# Altium PCB 4layer_main_board.PcbDoc (part 1 of 2)
Units mm, origin at the board's own origin, x right, y up, seen from the top; angles counter-clockwise.
Board outline 50 x 100 mm, 4 copper layers (Top Layer, Int1 (GND), Int2 (PWR), Bottom Layer), stack 1.369 mm thick; 72 components, 43 nets, 314 pads, 85 vias.
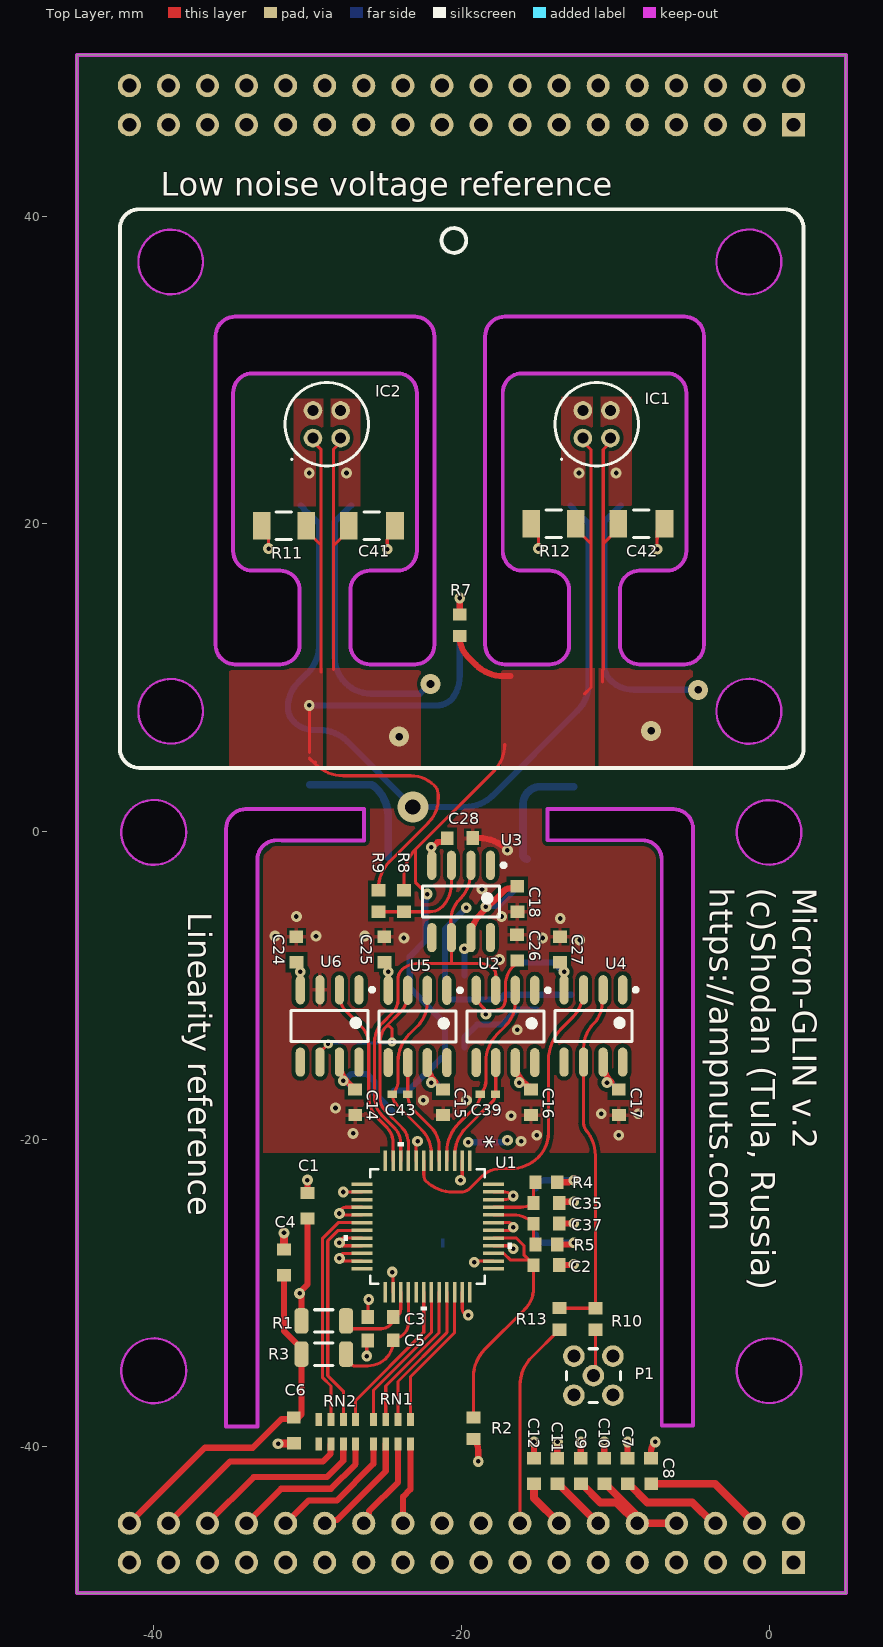
[diagram p0: Top Layer view]
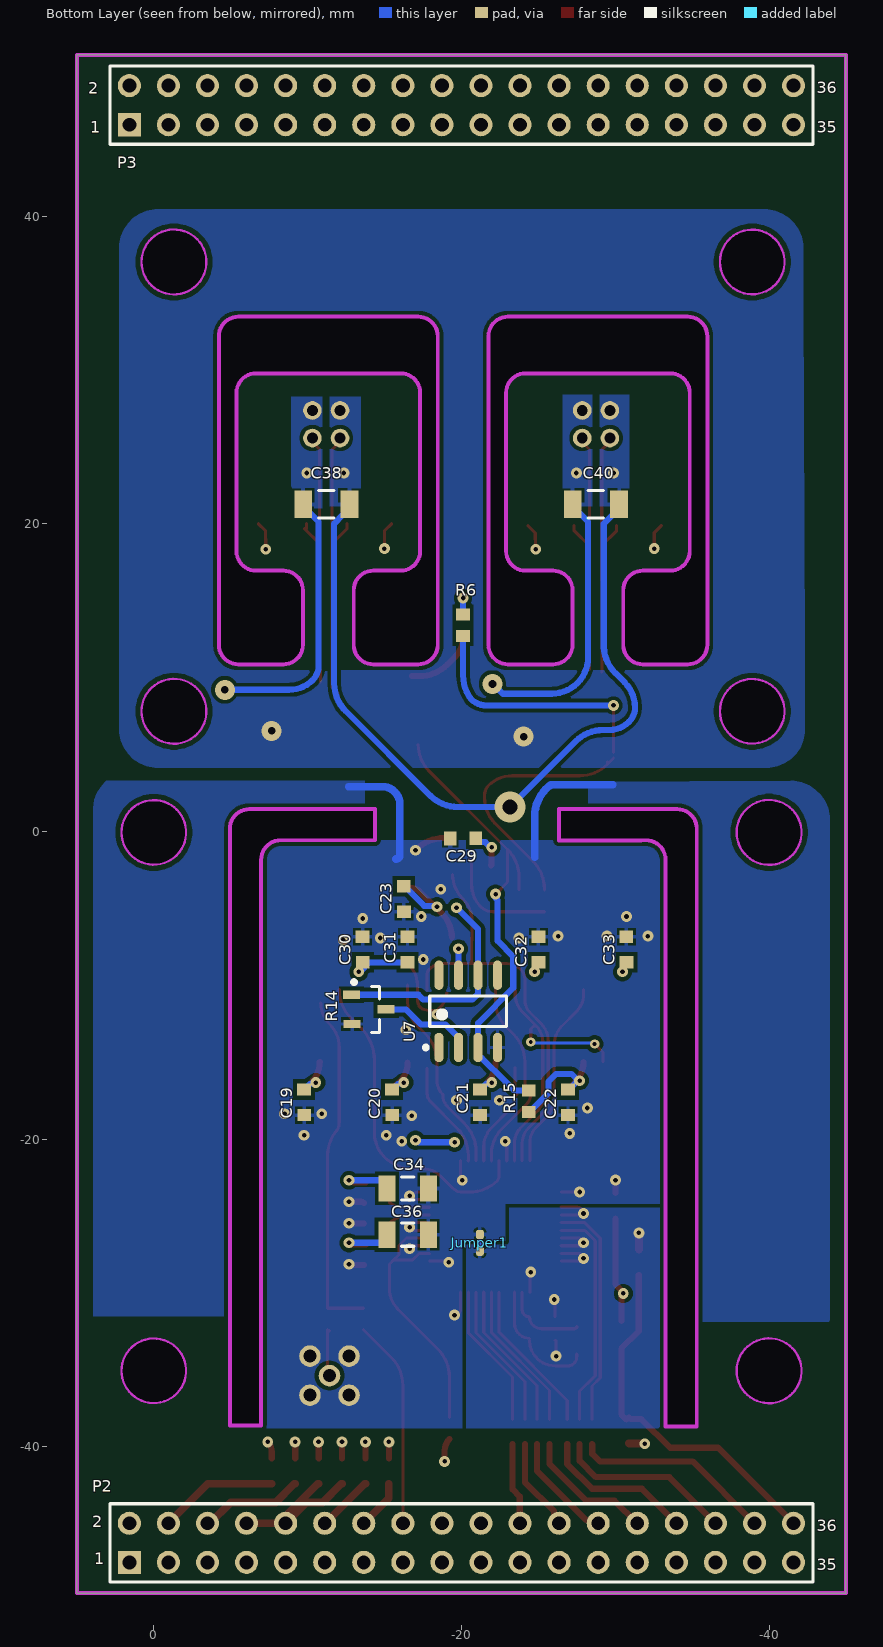
[diagram p1: Bottom Layer view, seen from below]
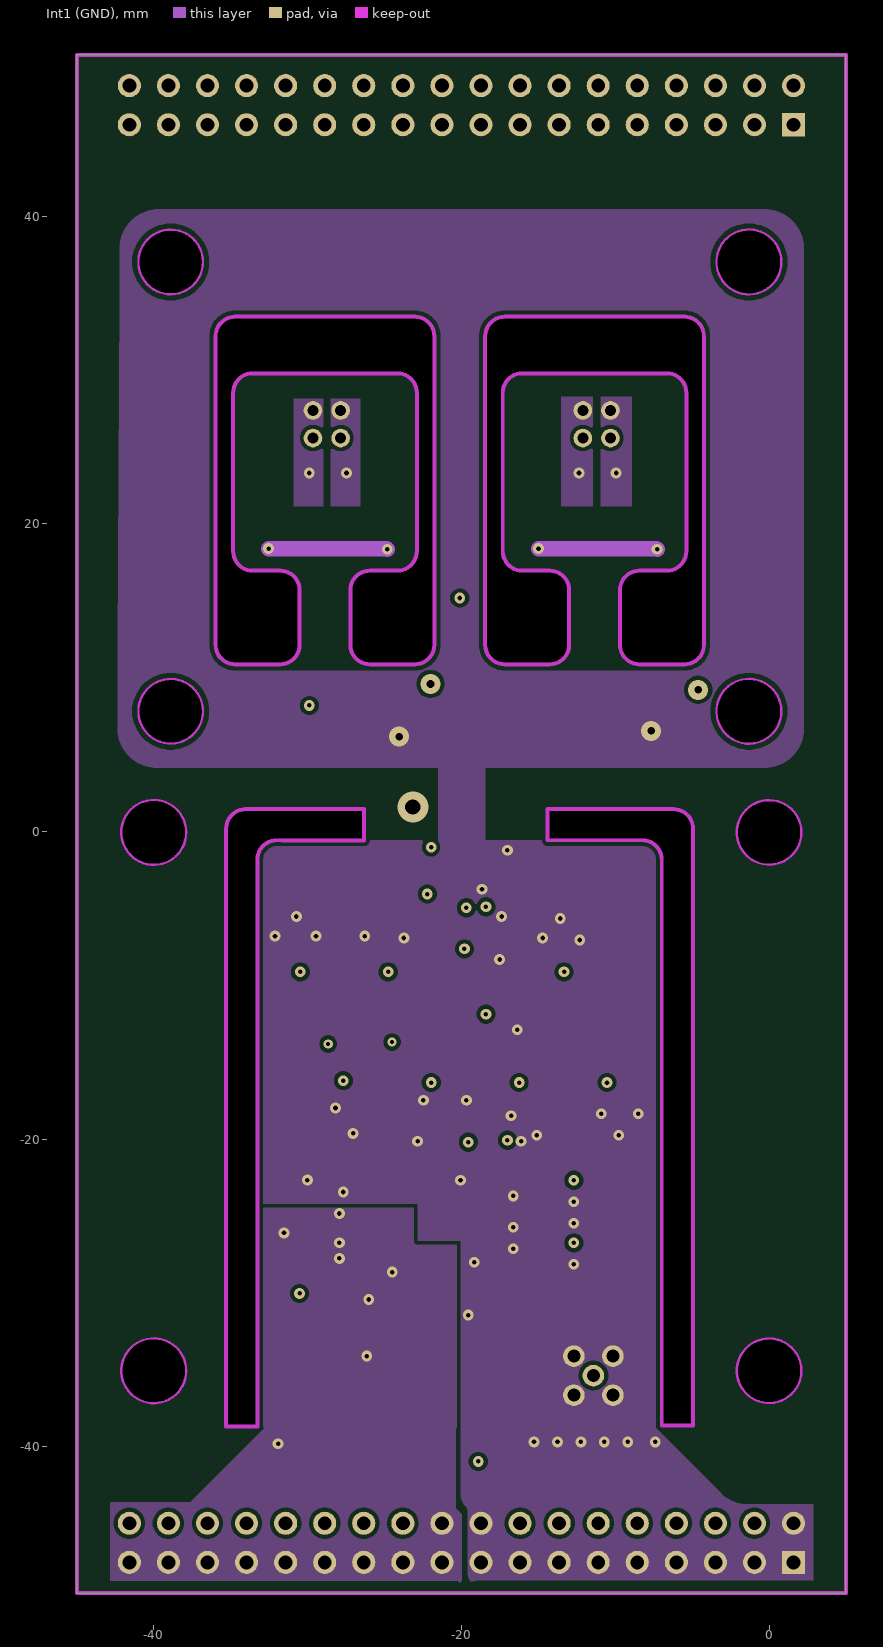
[diagram p2: Int1 (GND)]
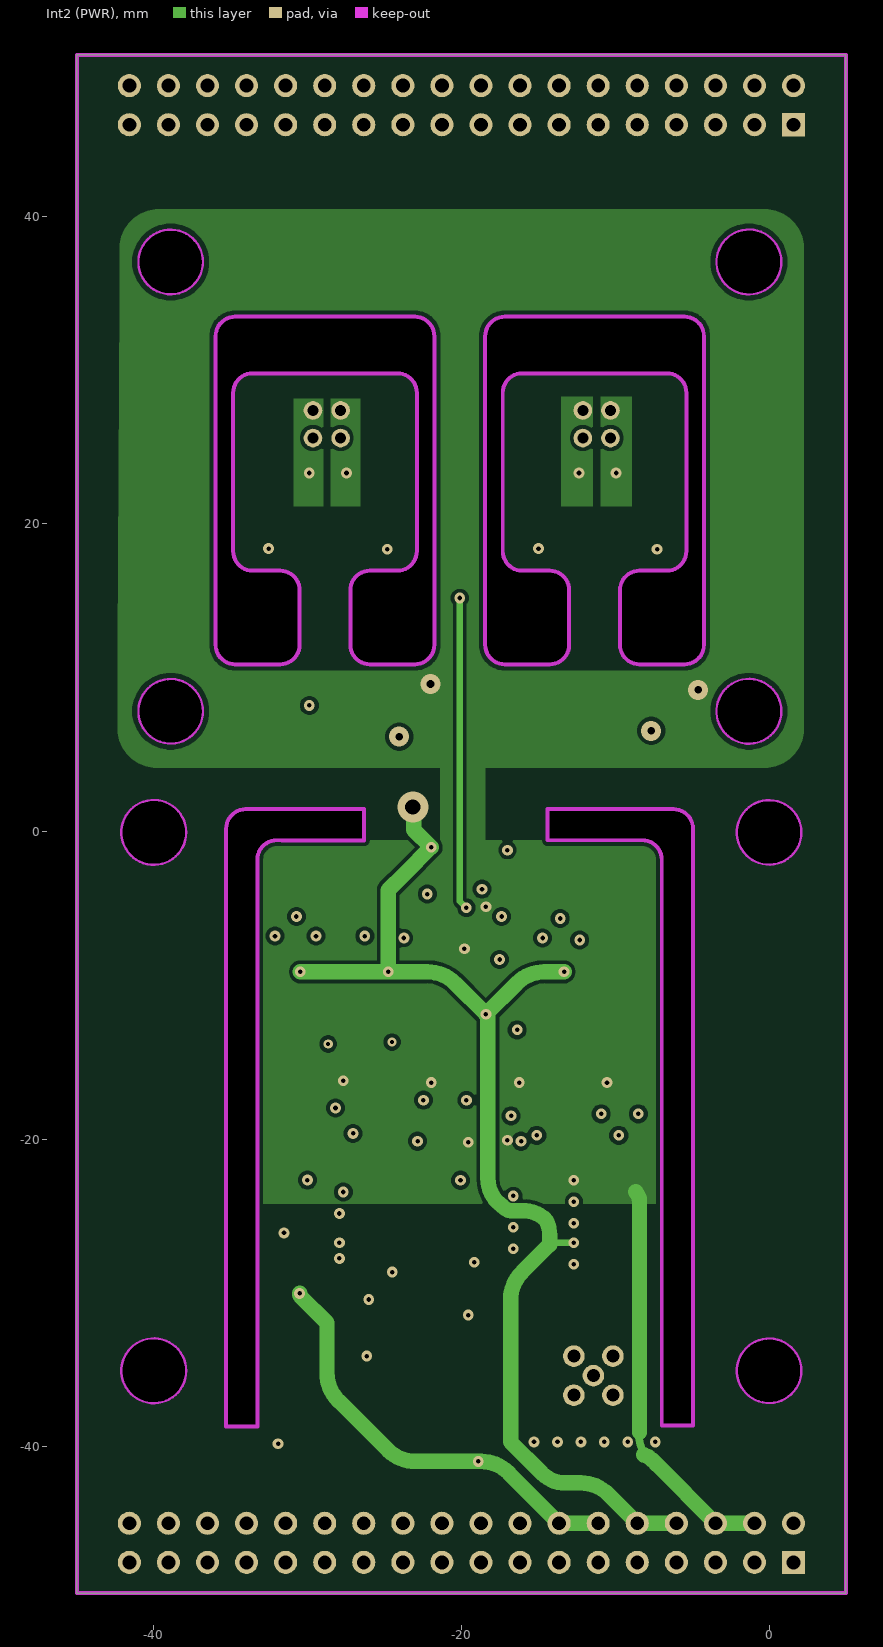
[diagram p3: Int2 (PWR)]

## Layer stack, top to bottom
Top Solder: solder mask 0.0254, SM-001, Dk 4
Top Layer: signal copper 0.035
Dielectric 1: prepreg 0.1295, PP-017, Dk 4.3
Dielectric 2: prepreg 0.1295, PP-017, Dk 4.3
Int1 (GND): signal copper 0.035
Dielectric 3: core 0.7112, Core-039, Dk 4.8
Int2 (PWR): signal copper 0.035
Dielectric 4: prepreg 0.1295, PP-017, Dk 4.3
Dielectric 5: prepreg 0.1295, PP-017, Dk 4.3
Bottom Layer: signal copper 0.035
Bottom Solder: solder mask 0.0254, SM-001, Dk 4

## Board outline
-45.005,-49.506 4.995,-49.506 4.995,50.494 -45.005,50.494
cut-out: -2.105,-35.052 ccw(c-0.005,-35.052) -0.005,-37.152 ccw(c-0.005,-35.052) 2.095,-35.052 ccw(c-0.005,-35.052) -0.005,-32.952 ccw(c-0.005,-35.052)
cut-out: -40.005,-2.162 cw(c-40.005,-0.052) -42.115,-0.052 cw(c-40.005,-0.052) -40.005,2.058 cw(c-40.005,-0.052) -37.895,-0.052 cw(c-40.005,-0.052)
cut-out: -2.105,-0.052 ccw(c-0.005,-0.052) -0.005,-2.152 ccw(c-0.005,-0.052) 2.095,-0.052 ccw(c-0.005,-0.052) -0.005,2.048 ccw(c-0.005,-0.052)
cut-out: -42.115,-35.052 ccw(c-40.005,-35.052) -40.005,-37.162 ccw(c-40.005,-35.052) -37.895,-35.052 ccw(c-40.005,-35.052) -40.005,-32.942 ccw(c-40.005,-35.052)
cut-out: -34.718,10.87 cw(c-34.718,12.14) -35.988,12.14 -35.988,32.206 cw(c-34.718,32.206) -34.718,33.476 -23.034,33.476 cw(c-23.034,32.206) -21.764,32.206 -21.764,12.14 cw(c-23.034,12.14) -23.034,10.87 -25.955,10.87 cw(c-25.955,12.14) -27.225,12.14 -27.225,15.696 cw(c-25.955,15.696) -25.955,16.966 -24.177,16.966 ccw(c-24.177,18.236) -22.907,18.236 -22.907,28.523 ccw(c-24.177,28.523) -24.177,29.793 -33.575,29.793 ccw(c-33.575,28.523) -34.845,28.523 -34.845,18.236 ccw(c-33.575,18.236) -33.575,16.966 -31.797,16.966 cw(c-31.797,15.696) -30.527,15.696 -30.527,12.14 cw(c-31.797,12.14) -31.797,10.87
cut-out: -17.192,10.87 cw(c-17.192,12.14) -18.462,12.14 -18.462,32.206 cw(c-17.192,32.206) -17.192,33.476 -5.508,33.476 cw(c-5.508,32.206) -4.238,32.206 -4.238,12.14 cw(c-5.508,12.14) -5.508,10.87 -8.429,10.87 cw(c-8.429,12.14) -9.699,12.14 -9.699,15.696 cw(c-8.429,15.696) -8.429,16.966 -6.651,16.966 ccw(c-6.651,18.236) -5.381,18.236 -5.381,28.523 ccw(c-6.651,28.523) -6.651,29.793 -16.049,29.793 ccw(c-16.049,28.523) -17.319,28.523 -17.319,18.236 ccw(c-16.049,18.236) -16.049,16.966 -14.271,16.966 cw(c-14.271,15.696) -13.001,15.696 -13.001,12.14 cw(c-14.271,12.14) -14.271,10.87
cut-out: -35.304,-38.67 -35.304,0.192 cw(c-34.034,0.192) -34.034,1.462 -26.336,1.462 -26.336,-0.56 cw(c-26.346,-0.56) -26.346,-0.57 -31.66,-0.57 cw(c-31.66,-0.56) -31.67,-0.56 -32.002,-0.56 ccw(c-32.002,-1.83) -33.272,-1.83 -33.272,-38.67
cut-out: -14.398,-0.56 -14.398,1.462 -6.221,1.462 cw(c-6.221,0.192) -4.951,0.192 -4.951,-38.611 -6.954,-38.611 cw(c-6.954,-38.582) -6.983,-38.582 -6.983,-1.83 ccw(c-8.253,-1.83) -8.253,-0.56
cut-out: -1.317,34.932 cw(c-1.317,37.032) -3.417,37.032 cw(c-1.317,37.032) -1.317,39.132 cw(c-1.317,37.032) 0.783,37.032 cw(c-1.317,37.032)
cut-out: -38.909,34.932 cw(c-38.909,37.032) -41.009,37.032 cw(c-38.909,37.032) -38.909,39.132 cw(c-38.909,37.032) -36.809,37.032 cw(c-38.909,37.032)
cut-out: -3.417,7.822 ccw(c-1.317,7.822) -1.317,5.722 ccw(c-1.317,7.822) 0.783,7.822 ccw(c-1.317,7.822) -1.317,9.922 ccw(c-1.317,7.822)
cut-out: -38.909,5.722 ccw(c-38.909,7.822) -36.809,7.822 ccw(c-38.909,7.822) -38.909,9.922 ccw(c-38.909,7.822) -41.009,7.822 ccw(c-38.909,7.822)

## Design rules (kind name [scope] priority, off if disabled: settings)
BoardOutlineClearance [All] p1: gap=0.381 ignorepadtopadclearanceinfootprint=FALSE
Clearance "Clearance Polygons" [InPolygon] p1: gap=0.254 ignorepadtopadclearanceinfootprint=FALSE except(0: Arc-Hole Track-Hole SMDPad-Hole THPad-Hole Via-Hole Fill-Hole Poly-Hole Region-Hole Text-Hole)
Clearance [All] p2: gap=0.127 ignorepadtopadclearanceinfootprint=FALSE except(0: Arc-Hole Track-Hole SMDPad-Hole THPad-Hole Via-Hole Fill-Hole Poly-Hole Region-Hole Text-Hole)
ComponentClearance "HM-TRP & UFL" [InComponent('X1') vs InComponent('U1')] p1: gap=0 collisioncheckmode=3 verticalgap=0 showdistances=FALSE
ComponentClearance [All] p2: gap=0.025 collisioncheckmode=3 verticalgap=0.025 showdistances=FALSE
DiffPairsRouting [All] p1: maxlimit=10 minlimit=0.127 mostfreqgap=0.203 toplayer_minwidth=0.127 toplayer_maxwidth=0.381 toplayer_prefwidth=0.203 midlayer1_minwidth=0.127 midlayer1_maxwidth=0.381 midlayer1_prefwidth=0.203 midlayer2_minwidth=0.127 midlayer2_maxwidth=0.381 midlayer2_prefwidth=0.203 bottomlayer_minwidth=0.127 bottomlayer_maxwidth=0.381 bottomlayer_prefwidth=0.203 maxuncoupledlength=12.7
HoleSize [All] p1: absolutevalues=TRUE maxlimit=6.731 minlimit=0.254 maxpercent=80.000 minpercent=20.000
HoleToHoleClearance [All] p1: gap=0.254 allowstackedmicrovias=FALSE
MinimumAnnularRing [All] p1: minimumring=0.102
MinimumSolderMaskSliver [All] p1: minsoldermaskwidth=0
PlaneClearance [All] p1: clearance=0.254
PlaneConnect [All] p1: planeconnectstyle=Relief reliefexpansion=0.102 reliefentries=4 reliefconductorwidth=0.152 reliefairgap=0.152
PolygonConnect PolygonConnect_pwr_gnd [IsPoly] p1: thpad.connectstyle=Direct thpad.reliefconductorwidth=0.254 thpad.reliefentries=4 thpad.polygonreliefangle="90 Angle" thpad.airgapwidth=0.152 smdpad.connectstyle=Relief smdpad.reliefconductorwidth=0.254 smdpad.reliefentries=4 smdpad.polygonreliefangle="90 Angle" smdpad.airgapwidth=0.152 via.connectstyle=Direct via.reliefconductorwidth=0.254 via.reliefentries=4 via.polygonreliefangle="90 Angle" via.airgapwidth=0.152
PolygonConnect PolygonConnect_1 [All] p2: connectstyle=Relief reliefconductorwidth=0.254 reliefentries=4 polygonreliefangle="90 Angle" airgapwidth=0.254
PolygonConnect "Via connect style" [isVia] p3: connectstyle=Direct reliefconductorwidth=0.254 reliefentries=4 polygonreliefangle="90 Angle" airgapwidth=0.254
RoutingCorners [All] p1: cornerstyle=45-Degree minsetback=1.25 maxsetback=1.25
RoutingVias [All] p1: holewidth=0.305 width=0.559 viastyle="Through Hole" minholewidth=0.254 minwidth=0.457 maxholewidth=2.54 maxwidth=2.896
SilkToSilkClearance [All] p1: silktosilkclearance=0
SilkToSolderMaskClearance [IsPad] p1: minsilkscreentomaskgap=0.127 clearancetoexposedcopper=TRUE
SolderMaskExpansion [All] p1: expansion=0.064 istentingtop=FALSE
Width GND [InNet('GND')] p1: maxlimit=0.762 minlimit=0.254 preferedwidth=0.508
Width Power [InNetClass('Power')] p2: maxlimit=1.016 minlimit=0.508 preferedwidth=0.762
Width 3V3 [InNetClass('3V3')] p3: maxlimit=0.762 minlimit=0.254 preferedwidth=0.508
Width [All] p4: maxlimit=10.16 minlimit=0.152 preferedwidth=0.203
20 further rules are at their usual default settings.

## Classes and differential pairs
component class shcematics: C1 C2 C3 C4 C5 C6 C7 C8 C9 C10 C11 C12 C14 C15 C16 C17 C18 C19 C20 C21 C22 C23 C24 C25 C26 C27 C28 C29 C30 C31 C32 C33 C34 C35 C36 C37 Jumper1 R1 R2 R3 R4 R5
component class v2: C38 C39 C40 C41 C42 C43 IC1 IC2 P1 P2 P3 R6 R7 R8 R9 R10 R11 R12 R13 R14 R15 RN1 RN2 U1 U2 U3 U4 U5 U6 U7

## Components (designator, comment, footprint, x,y, rotation, side; value= is the part's Value field where it differs from the comment)
C1 "10uF" "CAP 0603" -30.019,-24.309 r90 top
C2 "100nF" "CAP 0603" -14.476,-28.18 r0 top
C3 "100nF" "CAP 0603" -25.271,-31.558 r180 top
C4 "10uF" "CAP 0603" -31.543,-27.992 r90 top
C5 "100nF" "CAP 0603" -25.271,-33.082 r180 top
C6 "100nF" "CAP 0603" -30.908,-38.914 r90 top
C7 "100nF" "CAP 0603" -9.191,-41.581 r270 top
C8 "100nF" "CAP 0603" -7.667,-41.581 r270 top
C9 "100nF" "CAP 0603" -12.239,-41.581 r270 top
C10 "10uF" "CAP 0603" -10.715,-41.581 r270 top
C11 "100nF" "CAP 0603" -13.763,-41.581 r270 top
C12 "100nF" "CAP 0603" -15.287,-41.581 r270 top
C14 "100nF" "CAP 0603" -26.922,-17.588 r90 top
C15 "100nF" "CAP 0603" -21.207,-17.588 r90 top
C16 "100nF" "CAP 0603" -15.492,-17.588 r90 top
C17 "100nF" "CAP 0603" -9.777,-17.588 r90 top
C18 "100nF" "CAP 0603" -16.381,-4.38 r90 top
C19 "1uF" "CAP 0603" -9.777,-17.588 r90 bottom
C20 "1uF" "CAP 0603" -15.492,-17.588 r90 bottom
C21 "1uF" "CAP 0603" -21.207,-17.588 r90 bottom
C22 "1uF" "CAP 0603" -26.922,-17.588 r90 bottom
C23 "1uF" "CAP 0603" -16.254,-4.38 r90 bottom
C24 "100nF" "CAP 0603" -30.732,-7.682 r270 top
C25 "100nF" "CAP 0603" -25.017,-7.682 r270 top
C26 "100nF" "CAP 0603" -16.381,-7.555 r270 top
C27 "100nF" "CAP 0603" -13.587,-7.682 r270 top
C28 "100nF" "CAP 0603" -20.113,-0.433 r180 top
C29 "1uF" "CAP 0603" -20.113,-0.433 r180 bottom
C30 "1uF" "CAP 0603" -13.587,-7.682 r270 bottom
C31 "1uF" "CAP 0603" -16.508,-7.682 r270 bottom
C32 "1uF" "CAP 0603" -25.017,-7.682 r270 bottom
C33 "1uF" "CAP 0603" -30.732,-7.682 r270 bottom
C34 "10uF" C1206 -16.508,-23.193 r180 bottom
C35 "100nF" "CAP 0603" -14.476,-24.141 r0 top
C36 "10uF" C1206 -16.508,-26.207 r180 bottom
C37 "100nF" "CAP 0603" -14.476,-25.487 r0 top
C38 "1uF" CAPC3216X140N -11.223,21.284 r0 bottom
C39 "Cap Semi" 0402 -18.286,-17.08 r0 top value=100pF
C40 "1uF" CAPC3216X140N -28.749,21.284 r0 bottom
C41 "1uF" CAPC3216X140N -25.828,19.887 r0 top
C42 "1uF" CAPC3216X140N -8.302,20.014 r0 top
C43 "Cap Semi" 0402 -24.001,-17.08 r180 top value=100pF
IC1 "ADR1399KHZ" ADR1399KHZ -12.112,25.584 r45 top locked
IC2 "ADR1399KHZ" ADR1399KHZ -29.656,25.584 r45 top locked
Jumper1 "=value" "0402 jumper" -21.207,-26.732 r0 bottom net-tie
P1 "MMCX" MMCX2.54-V5 -11.428,-35.368 r0 top
P2 "Header 18X2" HDR2X18 1.585,-47.506 r180 bottom locked
P3 "Header 18X2" HDR2X18 1.585,45.954 r180 bottom locked
R1 "Ferrite beard" CC1206JRNPOBBN100 -28.954,-31.812 r180 top
R2 "10R" 1608[0603] -19.224,-38.787 r270 top
R3 "Ferrite beard" CC1206JRNPOBBN100 -28.954,-33.971 r180 top
R4 "10R" 1608[0603] -14.486,-22.795 r0 top
R5 "10R" 1608[0603] -14.486,-26.834 r0 top
R6 "2.67K 25ppmC" 1608[0603] -20.113,13.41 r270 bottom
R7 "2.67K 25ppmC" 1608[0603] -20.113,13.41 r270 top
R8 "2.67K 25ppmC" 1608[0603] -23.747,-4.507 r90 top
R9 "2.67K 25ppmC" 1608[0603] -25.398,-4.507 r90 top
R10 "50R" 1608[0603] -11.301,-31.685 r90 top
R11 "5R1" RESC3216X65N -31.543,19.887 r0 top
R12 "5R1" RESC3216X65N -14.017,20.014 r0 top
R13 "50R" 1608[0603] -13.636,-31.675 r90 top
R14 "MPMT50011002AT1" SOT23-3 -13.97,-11.557 r180 bottom value=5K
R15 "1M" 1608[0603] -24.384,-17.526 r90 bottom
RN1 "CAT16-470J4LF" CAT16-470J4LF -26.128,-38.213 r0 top
RN2 "CAT16-470J4LF" CAT16-470J4LF -29.684,-38.213 r0 top
U1 "DAC11001B" QFP_APFBR_TEX -22.203,-25.672 r270 top
U2 "OPA189ID" TI-D8_L -17.143,-12.668 r270 top
U3 "OPA189ID" TI-D8_L -20.025,-4.54 r270 top
U4 "OPA189ID" TI-D8_L -11.428,-12.635 r270 top
U5 "OPA189ID" TI-D8_L -22.858,-12.668 r270 top
U6 "OPA189ID" TI-D8_L -28.573,-12.635 r270 top
U7 "OPA189ID" TI-D8_L -20.447,-11.684 r90 bottom

## Footprints (in the part's own frame and the unit in brackets; to place one, negate y for a bottom-side part, rotate by r counter-clockwise, add the part's x,y. Pads: shape width x height; smd on the part's side, far side on the other; paste and mask are expansions set on the pad)
0402 [mm] "Chip Capacitor, Body 1.0x0.5mm, IPC High Density"
  rect 0.6x0.5 smd: 1(-0.5,0) 2(0.5,0)
  body extent -0.55,-0.3 0.55,0.3, height 1.3
"0402 jumper" [mm]
  rrect50% 0.5x0.6 smd: 1(0,0.545) 2(0,-0.545)
  Top Layer region: -0.125,0.275 0.075,0.275 0.075,-0.275 -0.1,-0.275
1608[0603] [mm]
  rect 0.8x0.9 smd: 1(-0.7,0) 2(0.7,0)
  body extent -0.87,-0.48 0.87,0.48, height 1.3
ADR1399KHZ [mm]
  round 1.214 hole 0.708: 1(0,0) 2(1.27,-1.27) 3(2.54,0) 4(1.27,1.27)
  silkscreen extent -2,-2.72 3.99,2.72, body extent -6.45,-7.54 8.81,7.72, height 6.1
C1206 [mm] "Chip Capacitor, Body 3.2x1.6mm, IPC High Density"
  rect 1.1x1.7 smd: 1(-1.35,0) 2(1.35,0)
  silkscreen extent -0.4,-0.75 0.4,0.75, body extent -1.7,-0.9 1.7,0.9, height 1.3
"CAP 0603" [mm] "Chip Capacitor, 2-Leads, Body 1,60x0,80mm, IPC Medium Density"
  rect 0.8x0.9 smd: 1(-0.84,-0.01) 2(0.82,0)
  body extent -0.85,-0.45 0.85,0.45, height 0.8
CAPC3216X140N [mm] "Chip Capacitor, Body 3.2x1.6mm, IPC Medium Density"
  rect 1.15x1.8 smd: 1(-1.5,0) 2(1.5,0)
  silkscreen extent -0.5,-0.9 0.5,0.9, body extent -1.7,-0.9 1.7,0.9, height 1.4
CAT16-470J4LF [mm]
  rect 0.45x0.85 smd: 1(0.4,0) 2(1.2,0) 3(2,0) 4(2.8,0) 5(0.4,-1.6) 6(1.2,-1.6) 7(2,-1.6) 8(2.8,-1.6)
  body extent 0,-1.6 3.2,0, height 0.5
CC1206JRNPOBBN100 [mm]
  rrect50% 0.9x1.65 smd: 1(-1.45,0) 2(1.45,0)
  silkscreen extent -0.6,-0.72 0.6,0.72, body extent -1.75,-0.8 1.75,0.8, height 0.7
HDR2X18 [mm] "Connector; Header; 18x2 Position"
  rect 1.5x1.5 hole 0.9: 1(0,0)
  round 1.5 hole 0.9: 2(0,2.54) 3(2.54,0) 4(2.54,2.54) 5(5.08,0) 6(5.08,2.54) 7(7.62,0) 8(7.62,2.54) 9(10.16,0) 10(10.16,2.54) 11(12.7,0) 12(12.7,2.54) 13(15.24,0) 14(15.24,2.54) 15(17.78,0) 16(17.78,2.54) 17(20.32,0) 18(20.32,2.54) 19(22.86,0) 20(22.86,2.54) 21(25.4,0) 22(25.4,2.54) 23(27.94,0) 24(27.94,2.54) 25(30.48,0) 26(30.48,2.54) 27(33.02,0) 28(33.02,2.54) 29(35.56,0) 30(35.56,2.54) 31(38.1,0) 32(38.1,2.54) 33(40.64,0) 34(40.64,2.54) 35(43.18,0) 36(43.18,2.54)
  silkscreen extent -1.27,-1.27 44.45,3.81
MMCX2.54-V5 [mm] "Connector; RF Coaxial, MMCX, Thru-Hole; 5 Position; Vertical"
  round 1.4 hole 0.85: 1(0,0) 2(-1.27,-1.27) 3(1.27,-1.27) 4(1.27,1.27) 5(-1.27,1.27)
  silkscreen extent -1.75,-1.75 1.75,1.75, body extent -1.78,-1.75 1.73,1.75, height 4.42
QFP_APFBR_TEX [mil]
  rect 53.5x9 smd paste+0 mask+0: 1(-168.25,108.3) 2(-168.25,88.6) 3(-168.25,68.91) 4(-168.25,49.22) 5(-168.25,29.53) 6(-168.25,9.85) 7(-168.25,-9.84) 8(-168.25,-29.53) 9(-168.25,-49.22) 10(-168.25,-68.91) 11(-168.25,-88.61) 12(-168.25,-108.3) 25(168.25,-108.3) 26(168.25,-88.6) 27(168.25,-68.91) 28(168.25,-49.22) 29(168.25,-29.53) 30(168.25,-9.84) 31(168.25,9.85) 32(168.25,29.53) 33(168.25,49.22) 34(168.25,68.91) 35(168.25,88.61) 36(168.25,108.3)
  rect 9x53.5 smd paste+0 mask+0: 13(-108.3,-168.25) 14(-88.6,-168.25) 15(-68.92,-168.25) 16(-49.23,-168.25) 17(-29.54,-168.25) 18(-9.84,-168.25) 19(9.85,-168.25) 20(29.53,-168.25) 21(49.22,-168.25) 22(68.91,-168.25) 23(88.61,-168.25) 24(108.29,-168.25) 37(108.29,168.25) 38(88.6,168.25) 39(68.91,168.25) 40(49.22,168.25) 41(29.53,168.25) 42(9.84,168.25) 43(-9.85,168.25) 44(-29.54,168.25) 45(-49.23,168.25) 46(-68.92,168.25) 47(-88.61,168.25) 48(-108.3,168.25)
  silkscreen extent -215,-215 215,215, body extent -181,-181 181,181, height 47
RESC3216X65N [mm] "Chip Resistor, EIA 1206, Metric 3216, Body 3.2x1.6mm, IPC Medium Density"
  rect 1.15x1.8 smd: 1(-1.45,0) 2(1.45,0)
  silkscreen extent -0.5,-0.9 0.5,0.9, body extent -1.67,-0.87 1.68,0.88, height 0.65
SOT23-3 [mm] "SOT23, 3-Leads, Body 2,90x2,45mm, Pitch 0,95mm, IPC Medium Density"
  rect 1.1x0.55 smd: 1(-1.12,0.95) 2(-1.07,-0.95) 3(1.14,0)
  silkscreen extent -1.08,-1.5 0.7,1.9, body extent -1.27,-1.5 1.33,1.5, height 1.1
TI-D8_L [mm] "SOIC, 8-Leads, Body 4.9x3.9mm, Pitch 1.27mm, IPC High Density"
  oval 1.9x0.6 smd: 1(-2.35,1.905) 2(-2.35,0.635) 3(-2.35,-0.635) 4(-2.35,-1.905) 5(2.35,-1.905) 6(2.35,-0.635) 7(2.35,0.635) 8(2.35,1.905)
  silkscreen extent -2.47,-2.5 1,2.88, body extent -2,-2.5 2,2.5, height 1.75

## Part data
C1 C2 C3 C4 C5 C6 C7 C8 C9 C10 C11 C12 C14 C15 C16 C17 C18 C19 C20 C21 C22 C23 C24 C25 C26 C27 C28 C29 C30 C31 C32 C33 C34 C35 C36 C37: library part "Cap Semi", "Capacitor (Semiconductor SIM Model)", LatestRevisionDate=29-May-2009, LatestRevisionNote="IPC-7351 Footprint Added.", Order=CC0603KRX7R8BB104, PackageDescription="Chip Capacitor", PackageReference=C1206, Published=8-Jun-2000, Publisher="Altium Limited"
C38 C40 C41 C42: library part CC1206_1UF_25V_10%_X7R, "Non-polarised capacitor", Case=1206, Manufacturer=GENERIC, Manufacturer1 ComponentHeight=1.75mm, Manufacturer1 Example=KEMET, Manufacturer1 Part Number=C1206C105K3RAC, Tolerance=±10%, Voltage=25V, Author="CERN DEM JLC", Component Type=Standard, CreateDate=03.12.2007, HelpURL=\\cern.ch\dfs\Applications\Altium\Datasheets\CC1206_X7R_KEMET.pdf, LatestRevisionDate=03.12.2007, Manufacturer Part Number=CC1206_1UF_25V_10%_X7R, Mounted=Yes, Part Description="SMD Multilayer Chip Ceramic Capacitor", Part Number=CC1206_1UF_25V_10%_X7R, Pin Count=2, Sense=No, SMD=Yes, Socket=No, Status=Preferred, TC=X7R
C39 C43: "Capacitor (Semiconductor SIM Model)", LatestRevisionDate=29-May-2009, LatestRevisionNote="IPC-7351 Footprint Added.", PackageDescription="Chip Capacitor", PackageReference=C1206, Published=8-Jun-2000, Publisher="Altium Limited"
IC1 IC2: "Integrated Circuit", Manufacturer_Name="Analog Devices", Datasheet Link=https://www.analog.com/media/en/technical-documentation/data-sheets/adr1399.pdf, Height=2.667mm, Manufacturer_Part_Number=ADR1399KHZ
Jumper1 R1 R2 R3 R4 R5 R6 R7 R8 R9 R10 R13 R15: library part "Resistor 0805", Avail=20
  R1 R2 R3 R4 R5: Order=ERA-3AEB4992V
  R6 R7 R15: BOM Order=ERA-3AEB2671V, Order=ERA-3AEB49R9V
  R8 R9 R10 R13: Order=ERA-3AEB49R9V
P1: library part COAX-M, "RF Coaxial PCB Connector, MMCX; Thru-Hole, Vertical Mount Plug,  50 Ohm Impedance", PackageDocument="Rev. A, 16-Jun-1997", ComponentLink1Description="Manufacturer Link", ComponentLink1URL=http://www.amphenolrf.com/, DatasheetDocument=30-May-2003, DrillSize="Corresponds to nominal value.", LatestRevisionDate=15-Jul-2004, LatestRevisionNote="Component Replaced.", PackageReference=908-21103, PCB_Layout="Complies with manufacturer's recommendation.", Published=15-Jul-2004, Publisher="Altium Limited"
P2 P3: "Header, 18-Pin, Dual row", LatestRevisionDate=17-Jul-2002, LatestRevisionNote="Re-released for DXP Platform.", Publisher="Altium Limited"
R11 R12: library part R1206_5R6_1%_0.25W_200PPM, "Resistor - 1%", Case=1206, Manufacturer=GENERIC, Manufacturer1 ComponentHeight=0.65mm, Manufacturer1 Example="YAGEO PHYCOMP", Manufacturer1 Part Number="232272465608L or RC1206FR-075R6L", Power=0.25W, Tolerance=±1%, Author="CERN DEM JLC", Component Type=Standard, CreateDate=24.06.2009, HelpURL=\\cern.ch\dfs\Applications\Altium\Datasheets\R1206_Phycomp_RC1206.pdf, LatestRevisionDate=17.10.2012, Manufacturer Part Number=R1206_5R6_1%_0.25W_200PPM, Mounted=Yes, Part Description="General Purpose Thick Film Chip Resistor", Part Number=R1206_5R6_1%_0.25W_200PPM, Pin Count=2, PressFit=No, Sense=No, SMD=Yes, Socket=No, Status=Preferred, TC=±200ppm/°C
R14: library part MPMT, Value2=10K, LatestRevisionDate=29-May-2009, LatestRevisionNote="IPC-7351 Footprint Added.", Order=MPMT50011002AT1, PackageDescription="Chip Resistor", PackageReference=J1-0603, Published=8-Jun-2000, Publisher="Altium Limited"
U1: library part DAC11001APFBR, "No Description Available", Built_By=EMA_Matt, Copyright="Copyright (C) 2018 Accelerated Designs. All rights reserved", Datasheet=https://www.ti.com/lit/ds/symlink/dac11001a.pdf, Manufacturer_Part_Number=DAC11001APFBR, RefDes=RefDes, SourceLibrary=Texas_Instruments_2020-07-20, Type=DEV, Vendor="Texas Instruments"
U2 U3 U4 U5 U6 U7: library part OPA140AIDR, "11 MHz, Single Supply, Low Noise, Precision, Rail-to-Rail Output, JFET Amplifier, 4.5 to 36 V, -40 to 125 degC, 8-pin SOIC (D8), Green (RoHS & no Sb/Br)", Manufacturer="Texas Instruments", Rating=Catalog, Supplier Part Number 1=OPA140AIDR-ND, Total Supply Voltage(Max)(+5V is 5, +/-5V is 10)=36, Total Supply Voltage(Min)(+5V is 5, +/-5V is 10)=4.5, CMRR(Min)(dB)=126, Code_JEDEC=MS-012, ComponentLink1Description="Manufacturer URL", ComponentLink1URL=http://www.ti.com/, ComponentLink2Description=Datasheet, ComponentLink2URL=http://www.ti.com/lit/ds/symlink/opa140.pdf, ComponentLink3Description="Package Specification", ComponentLink3URL=http://www.ti.com/litv/pdf/msoi002j, DatasheetVersion=SBOS498A, Eco-Plan="Green (RoHS & no Sb/Br)", GBW(Typ)(MHz)=11, IIB(Max)(pA)=10, Iq per channel(Max)(mA)=2, Mounting Technology="Surface Mount", Number of Channels=1, Offset Drift(Typ)(uV/C)=0.35, PackageDescription="8-Pin Plastic Small Outline, Body 4.9 x 3.9 mm, Pitch 1.27 mm", PackageReference=D8, PackageVersion="4040047-3/M, 06/2011", Packing="LARGE T&R", PartNumber=OPA189ID, Slew Rate(Typ)(V/us)=20, Sub Family="High Supply Voltage Amplifier (>=30V), Low Input Bias Current Amp (<=10pA), Low Noise Amp (<=10nV/rtHz), Low Offset Voltage Amplifier (<=500uV), Precision Amplifier", Supplier 1=Digi-Key, Supplier 2=Newark, Supplier 3=Mouser, Supplier Part Number 2=21T3836, Supplier Part Number 3=595-OPA140AIDR, Vio (25C)(Max)(mV)=0.12

## Via types
v1: diameter 0.7, hole 0.3, Top Layer to Bottom Layer, tented both sides, 78 vias
v2: diameter 1.3, hole 0.5, Top Layer to Bottom Layer, tented both sides, 4 vias
v3: diameter 0.6, hole 0.254, Top Layer to Bottom Layer, tented both sides, 2 vias
v4: diameter 2, hole 1, Top Layer to Bottom Layer, tented both sides, 1 vias

## Nets (pads, with @x,y where several pads share a name; then routed paths per layer and width w, separated by ;. In a path a pad name is that pad's centre, name@x,y a point inside that pad or via, vN(x,y) a via of type N, cw(c..) or ccw(c..) an arc to the next point about the centre after c; other vN are vias at no path point)
+3.3V: C4.1 C6.2 P2.36 R3.2 | length 23.5
  Top Layer w0.4: P2.36 -36.686,-40.057 -33.575,-40.057 -31.709,-38.191 -31.005,-38.191 C6.2 ; C4.1 -31.533,-32.467 -30.404,-33.596 R3.2 -30.404,-37.902 C6.2@-30.727,-38.225
+5V: C1.1 C11.2 C12.2 P2.12 P2.14 R1.2 R2.2 | length 43.6
  Top Layer w0.4: R1.2 -30.404,-30.228 -30.527,-30.105 v1(-30.527,-30.024) -30.527,-29.943 -30.009,-29.425 C1.1 ; R2.2 cw(c-19.977,-40.24) -18.912,-40.24 v1(-18.912,-40.946)
  Top Layer w0.5: C12.2 -15.287,-43.334 P2.14 P2.14@-13.655,-44.695 ; C11.2 -13.713,-42.401 -11.148,-44.966 P2.12
  Int2 (PWR) w1: v1(-30.527,-30.024) ccw(c-30.22,-30.024) -30.437,-30.241 -28.749,-31.929 -28.749,-35.195 ccw(c-26.209,-35.195) -28.005,-36.991 -24.794,-40.202 ccw(c-22.998,-38.406) -22.998,-40.946 v1(-18.912,-40.946) -18.727,-40.946 cw(c-18.727,-43.486) -16.931,-41.69 P2.14 P2.12
+15V: C7.2 C8.2 C14.2 C15.2 C16.2 C17.2 C18.2 C19.2 C20.2 C21.2 C22.2 C23.2 C34.1 C38.2 C40.2 IC1.3 IC2.3 P2.4 P2.6 R4.2 R15.1 U2.7 U3.7 U4.7 U5.7 U6.7 U7.7 | length 108.6
  Top Layer w0.4: U6.7 ccw(c-26.086,-14.985) -27.396,-16.294 C14.2 ; U5.7 ccw(c-20.451,-15.018) v1@-21.704,-16.271 ; U3.7 cw(c-17.22,-6.89) -18.754,-5.356 -17.27,-3.872 cw(c-16.823,-4.319) -16.823,-3.687 C18.2@-16.381,-3.687 ; U2.7 ccw(c-14.736,-15.018) C16.2@-15.439,-16.645 ; R4.2 -13.005,-22.795 ccw(c-13.005,-22.361) v1(-12.698,-22.668) ; U4.7 ccw(c-8.941,-14.985) v1@-10.251,-16.294
  Top Layer w0.5: C7.2 -9.141,-42.401 -7.929,-43.613 -5,-43.613 -3.647,-44.966 P2.6 ; C8.2 -3.52,-42.401 P2.4
  Int2 (PWR) w0.5: -8.429,-38.66 -8.585,-38.906 -8.377,-39.833 -8.142,-40.518
  Int2 (PWR) w1: -8.683,-23.42 cw(c-9.296,-24.033) -8.429,-24.033 -8.429,-38.66 -8.429,-39.063 cw(c-9.429,-39.061) -8.429,-39.065 ; -8.155,-40.523 ccw(c-7.667,-39.676) -8.001,-40.594 cw(c-8.34,-41.535) -7.634,-40.827 cw(c-8.34,-41.535) -7.632,-40.829 -7.337,-41.124 P2.6 P2.4
  Bottom Layer w0.4: C40.2@-27.174,21.208 -28.241,20.141 -28.241,11.334 ccw(c-25.872,11.334) -25.872,8.965 -22.702,8.965 -22.067,9.6 v2(-22.018,9.6) ; C22.2 -26.972,-16.768 -27.492,-16.248 -27.627,-16.248 v1(-27.684,-16.191) -27.603,-16.191 -27.16,-15.748 -26.162,-15.748 -25.654,-16.256 -25.654,-17.006 -24.434,-18.226 R15.1 ; v1(-21.969,-16.318) -21.912,-16.375 -21.65,-16.375 -21.257,-16.768 C21.2 ; U7.7 v1(-19.812,-7.62) ; v1(-19.558,-20.193) -17.226,-20.193 -17.099,-20.066 v1(-17.018,-20.066) ; v1(-18.413,-4.888) -18.356,-4.831 -17.575,-4.831 -16.304,-3.56 C23.2 ; v1(-16.254,-16.318) -16.197,-16.375 -15.935,-16.375 -15.542,-16.768 C20.2 ; C34.1 cw(c-14.633,-23.193) -14.633,-22.668 v1(-12.698,-22.668) ; v1(-10.539,-16.318) -10.482,-16.375 -10.22,-16.375 -9.827,-16.768 C19.2 ; C38.2@-9.648,21.208 -10.715,20.141 -10.715,10.774 ccw(c-9.414,10.774) -10.334,9.854 ccw(c-8.801,11.387) -8.801,9.219 v2(-4.619,9.219)
  other v1: -27.479,23.316 -9.953,23.316
-15V: C9.2 C10.2 C24.2 C25.2 C26.2 C27.2 C28.2 C29.2 C30.2 C31.2 C32.2 C33.2 C36.1 C38.1 C40.1 IC1.4 IC2.4 P2.8 P2.10 R5.2 U2.4 U3.4 U4.4 U5.4 U6.4 | length 156.7
  Top Layer w0.203: U2.4@-19.048,-10.509 ccw(c-17.9,-10.509) -18.712,-11.32 -18.517,-11.515 ; v1@-18.266,-11.619 -17.866,-11.619 ccw(c-17.866,-10.765) -17.262,-11.369 ccw(c-18.444,-10.826) -17.143,-10.826 -17.143,-9.953 cw(c-15.481,-9.953) -16.656,-8.777 C26.2@-16.381,-8.502
  Top Layer w0.4: U3.4 -21.95,-2.169 -21.95,-1.037 v1(-21.971,-1.016) -21.89,-1.016 -21.557,-0.683 -21.133,-0.683 -20.933,-0.483 C28.2 ; R5.2 -12.943,-26.834 ccw(c-12.943,-26.487) v1(-12.698,-26.732)
  Top Layer w0.5: C9.2 -12.189,-42.401 -10.977,-43.613 -9.928,-43.613 P2.10 ; C10.2 -10.665,-42.401 -8.1,-44.966 P2.8
  Int2 (PWR) w0.4: -14.271,-26.849 cw(c-13.989,-27.131) -13.989,-26.732 v1(-12.698,-26.732)
  Int2 (PWR) w1: v1(-30.478,-9.115) v1(-24.763,-9.115) ; v4(-23.161,1.599) -23.106,1.544 -23.106,0.119 v1(-21.971,-1.016) -23.704,-2.749 -24.763,-3.808 -24.763,-5.305 v1(-24.763,-9.115) ; v1(-13.333,-9.115) -14.603,-9.115 ccw(c-14.603,-11.655) -16.399,-9.859 v1(-18.413,-11.873) ; P2.8 P2.10 -10.454,-43.087 ccw(c-12.25,-44.883) -12.25,-42.343 -13.255,-42.343 cw(c-13.255,-40.197) -14.773,-41.714 -16.811,-39.676 -16.811,-30.441 cw(c-14.271,-30.441) -16.067,-28.645 -14.271,-26.849 -14.271,-26.214 ccw(c-16.329,-26.214) -14.511,-25.25 ccw(c-15.94,-26.679) -15.832,-24.661 ccw(c-15.94,-26.679) -15.94,-24.658 -16.53,-24.658 ccw(c-16.528,-25.658) -16.581,-24.659 cw(c-16.635,-23.684) -16.635,-24.661 cw(c-16.635,-23.684) -17.373,-24.324 ccw(c-18.127,-24.982) -17.631,-24.113 cw(c-16.05,-22.532) -18.286,-22.532 -18.286,-12 v1(-18.413,-11.873) ; v1(-24.763,-9.115) -22.223,-9.115 cw(c-22.223,-11.655) -20.427,-9.859 v1(-18.413,-11.873)
  Bottom Layer w0.4: C40.1@-30.451,21.209 -30.249,21.006 -30.249,20.959 -29.874,20.584 -29.827,20.584 -29.257,20.014 -29.257,12.108 cw(c-31.797,12.108) -29.26,11.987 cw(c-31.797,12.108) -30.001,10.312 -30.618,9.695 ccw(c-28.997,8.075) -31.289,8.075 ccw(c-29.998,8.075) -30.911,7.162 -30.861,7.112 ccw(c-29.635,8.338) -29.635,6.604 -29.21,6.604 cw(c-29.21,4.084) -27.428,5.866 v4(-23.161,1.599) -19.768,1.599 ccw(c-19.768,4.139) -17.972,2.343 -12.475,7.84 ccw(c-14.271,9.636) -11.731,9.636 -11.731,20.014 -12.301,20.584 -12.348,20.584 -12.723,20.959 -12.723,21.006 C38.1@-12.926,21.209 ; v1(-24.763,-9.115) v1@-24.736,-9.142 ; v1(-21.971,-1.016) -21.89,-1.016 -21.557,-0.683 -21.133,-0.683 -20.933,-0.483 C29.2 ; C31.2 -14.027,-8.502 -13.414,-9.115 v1(-13.333,-9.115) ; C36.1 ccw(c-14.633,-26.207) -14.633,-26.732 v1(-12.698,-26.732)
  other v1: -29.892,23.316 -12.366,23.316
AGND: C1.2 C2.2 C7.1 C8.1 C9.1 C10.1 C11.1 C12.1 C14.1 C15.1 C16.1 C17.1 C18.1 C19.1 C20.1 C21.1 C22.1 C23.1 C24.1 C25.1 C26.1 C27.1 C28.1 C29.1 C30.1 C31.1 C32.1 C33.1 C34.2 C35.2 C36.2 C37.2 C41.1 C42.1 IC1.2 IC2.2 Jumper1.2 P1.2 P1.3 P1.4 P1.5 P2.1 P2.2 P2.3 P2.5 P2.7 P2.9 P2.11 P2.13 P2.15 P2.17 P2.18 R14.2 U1.2 U1.8 U1.14 U1.35 U1.38 U1.40 U1.42 U1.43 U1.46 U1.47 U6.3 U7.4 | length 77.6
  Top Layer w0.203: -28.328,10.548 -28.328,18.562 ; IC2.2@-27.86,25.31 -28.328,24.843 -28.328,18.562 ; v1(-27.684,-23.43) -27.675,-23.421 U1.14 ; C41.1 -27.328,19.562 -28.328,18.562 ; U1.8 -22.954,-20.359 cw(c-22.627,-20.359) v1(-22.858,-20.128) ; v1(-20.064,-22.668) ccw(c-20.333,-22.399) -19.953,-22.399 U1.2 ; U1.35 -19.953,-31.034 ccw(c-19.556,-31.034) v1(-19.556,-31.431) ; v1(-19.175,-28.002) cw(c-19.095,-28.002) -19.095,-27.922 U1.38 ; U1.40 -16.826,-26.922 cw(c-16.826,-27.113) v1(-16.635,-27.113) ; U1.42 -16.841,-25.922 ccw(c-16.841,-25.716) v1(-16.635,-25.716) ccw(c-16.93,-25.716) -16.93,-25.421 U1.43 ; U1.46 -17.207,-23.921 ccw(c-17.207,-23.112) v1(-16.635,-23.684) ccw(c-17.27,-24.319) -17.27,-23.421 U1.47 ; -10.842,9.727 -10.842,10.489 -10.783,10.548 -10.783,18.708 ; IC1.2 -10.316,25.31 -10.783,24.843 -10.783,18.708 ; C42.1@-9.929,19.689 C42.1@-9.929,20.014 ; C42.1@-9.802,19.689 -10.783,18.708
  Top Layer w0.4: C1.2 v1@-30.019,-22.785 ; C28.1 -18.85,-0.423 cw(c-18.85,-2.963) -17.054,-1.167 v1(-17.016,-1.205) ; C12.1 -15.297,-39.7 cw(c-15.263,-39.7) v1(-15.287,-39.676) ; C11.1 -13.773,-39.7 cw(c-13.739,-39.7) v1(-13.763,-39.676) ; C2.2 -12.821,-28.18 ccw(c-12.821,-28.006) v1(-12.698,-28.129) ; C37.2 -12.759,-25.487 ccw(c-12.759,-25.401) v1(-12.698,-25.462) ; C35.2 cw(c-13.472,-24.325) -13.472,-24.065 v1(-12.698,-24.065) ; C9.1 -12.249,-39.7 cw(c-12.215,-39.7) v1(-12.239,-39.676) ; C10.1 -10.725,-39.7 cw(c-10.691,-39.7) v1(-10.715,-39.676) ; C7.1 -9.201,-39.7 cw(c-9.167,-39.7) v1(-9.191,-39.676) ; C8.1 -7.677,-40.313 cw(c-6.776,-40.313) v1(-7.413,-39.676)
  Bottom Layer w0.5: -29.845,3.048 -25.961,3.048 cw(c-25.961,2.614) -25.654,2.921 -25.509,2.776 cw(c-27.305,0.98) -24.765,0.98 -24.765,-1.651 ; -15.748,-1.778 cw(c-15.748,-1.524) -16.002,-1.524 -16.002,1.778 cw(c-14.859,1.778) -14.859,2.921 -12.7,2.921
  other v1: -30.019,-22.658 -16.127,-20.128 -15.111,-19.747 -9.777,-19.747 -27.049,-19.62 -16.779,-18.477 -10.92,-18.35 -8.507,-18.35 -28.192,-17.969 -22.477,-17.461 -19.683,-17.461 -16.381,-12.889 -17.524,-8.317 -12.317,-7.047 -23.747,-6.92 -14.73,-6.92 -32.129,-6.793 -29.462,-6.793 -26.287,-6.793 -13.587,-5.65 -30.732,-5.523 -17.397,-5.523 -18.667,-3.745
  other v2: -24.05,6.171 -7.667,6.552
DAC_ALARM: P2.32 RN2.7 | length 11.6
  Top Layer w0.4: P2.32 -33.511,-41.962 -28.749,-41.962 -27.684,-40.897 RN2.7
DAC_AVDD: C2.1 R2.1 U1.39 U1.41 | length 17.5
  Top Layer w0.203: R2.1 -19.224,-35.453 cw(c-16.684,-35.453) -18.48,-33.657 -15.91,-31.087 ccw(c-17.344,-29.653) -15.316,-29.653 C2.1 -15.316,-28.14 C2.1@-15.615,-27.841 ; U1.39 -17.917,-27.435 -17.241,-27.435 -16.835,-27.841 C2.1@-15.615,-27.841 ; U1.41 -16.437,-26.422 -15.948,-26.911 -15.948,-27.507 C2.1@-15.615,-27.841
DAC_CLR: P2.30 RN2.8 | length 10
  Top Layer w0.4: P2.30 -31.733,-42.724 -28.495,-42.724 -26.884,-41.113 RN2.8
DAC_DVDD: C3.1 R1.1 U1.27 | length 5.5
  Top Layer w0.203: R1.1@-27.504,-32.193 ccw(c-27.377,-32.193) -27.377,-32.32 -25.203,-32.32 ccw(c-25.203,-31.548) C3.1 ccw(c-24.431,-31.071) -23.954,-31.071 U1.27
DAC_IOVDD: C5.1 R3.1 U1.28 | length 8.1
  Top Layer w0.203: R3.1 -27.504,-34.151 ccw(c-26.922,-34.151) -27.44,-34.416 ccw(c-26.922,-34.151) -27.187,-34.669 ccw(c-26.922,-34.151) -26.922,-34.733 -26.092,-34.733 ccw(c-26.092,-33.072) -24.468,-33.421 C5.1 ; C5.1@-24.431,-32.945 ccw(c-24.431,-31.968) -23.454,-31.968 U1.28
DAC_LDAC: P2.34 RN2.6 | length 13.1
  Top Layer w0.4: P2.34 -35.035,-40.946 -29.003,-40.946 -28.509,-40.452 -28.509,-39.838 RN2.6
DAC_VCC: C35.1 R4.1 U1.45 | length 4.1
  Top Layer w0.203: U1.45 -16.152,-24.421 ccw(c-16.152,-23.239) C35.1@-15.316,-24.075 ; C35.1 C35.1@-15.316,-24.075 ; R4.1 ccw(c-14.872,-23.109) -15.316,-23.109 C35.1@-15.316,-24.075
DAC_VSS: C37.1 R5.1 U1.44 | length 4.1
  Top Layer w0.203: U1.44 -16.645,-24.921 cw(c-16.645,-26.801) C37.1@-15.316,-25.472 ; C37.1 -15.316,-26.52 ccw(c-14.872,-26.52) R5.1
DGND: C3.2 C4.2 C5.2 C6.1 Jumper1.1 P2.19 P2.20 P2.21 P2.23 P2.25 P2.27 P2.29 P2.31 P2.33 P2.35 U1.16 U1.17 U1.20 U1.21 U1.22 U1.23 U1.26 | length 15.3
  Top Layer w0.203: U1.23 -27.764,-27.922 cw(c-27.764,-27.748) v1(-27.938,-27.748) cw(c-27.612,-27.748) -27.612,-27.422 U1.22 ; U1.21 -27.748,-26.922 cw(c-27.748,-26.732) v1(-27.938,-26.732) cw(c-27.628,-26.732) -27.628,-26.422 U1.20 ; U1.17 -27.844,-24.921 cw(c-27.844,-24.827) v1(-27.938,-24.827) cw(c-27.532,-24.827) -27.532,-24.421 U1.16 ; v1(-26.16,-34.098) -26.16,-33.151 cw(c-26.091,-33.151) C5.2 ; C3.2 -26.091,-30.473 cw(c-26.033,-30.473) v1(-26.033,-30.415) ; v1(-24.509,-28.637) cw(c-24.509,-28.692) -24.454,-28.692 U1.26
  Top Layer w0.5: v1(-31.924,-39.803) -31.899,-39.778 -30.922,-39.778 C6.1 ; C4.2 v1(-31.543,-26.087)
NetC39_1: C39.1 U1.4 U2.2 | length 12.9
  Top Layer w0.203: U1.4 -20.953,-20.799 cw(c-18.413,-20.799) -20.209,-19.003 -19.14,-17.934 ccw(c-19.993,-17.08) C39.1 ccw(c-19.686,-16.179) -18.413,-16.179 -18.413,-14.957 cw(c-15.873,-14.957) -17.669,-13.161 -17.143,-12.635 ccw(c-18.676,-11.102) -16.508,-11.102 U2.2@-16.508,-9.968
NetC39_2: C39.2 U1.3 U2.6 | length 7
  Top Layer w0.203: U1.3 U1.3@-20.453,-21.389 ; U1.3@-20.444,-21.397 U1.3@-20.453,-21.389 ; U2.6@-17.778,-15.368 -17.778,-17.072 C39.2 cw(c-18.419,-17.08) -17.942,-17.496 cw(c-18.419,-17.08) -17.971,-17.527 -19.709,-19.265 ccw(c-17.913,-21.061) -20.453,-21.061 U1.3@-20.453,-21.389
NetC41_2: C41.2 R11.1 | length 11.1
  Top Layer w0.2: R11.1 -32.54,19.434 v1(-32.54,18.4)
  Top Layer w0.203: v1(-24.83,18.363) -24.83,18.97 -24.801,18.998 -24.801,19.414 C41.2
  Int1 (GND) w1: v1(-32.54,18.4) -24.867,18.4 v1(-24.83,18.363)
NetC42_2: C42.2 R12.1 | length 11.4
  Top Layer w0.203: R12.1 -14.996,19.543 v1(-14.996,18.4) v1@-15.033,18.363 ; v1(-7.286,18.363) -7.286,19.018 -7.275,19.028 -7.275,19.541 C42.2
  Int1 (GND) w1: v1(-14.996,18.4) -7.323,18.4 v1(-7.286,18.363)
NetC43_1: C43.1 U1.5 U5.6 | length 6.8
  Top Layer w0.203: C43.1@-23.628,-17.08 ccw(c-23.954,-16.754) -23.493,-16.754 U5.6@-23.493,-15.335 ; C43.1 ccw(c-21.987,-17.08) -23.058,-18.15 -21.969,-19.239 cw(c-23.214,-20.484) -21.453,-20.484 U1.5
NetC43_2: C43.2 U1.6 U5.2 | length 13.1
  Top Layer w0.203: U5.2@-22.223,-9.935 -22.223,-11.102 cw(c-24.391,-11.102) -22.858,-12.635 -23.384,-13.161 ccw(c-21.588,-14.957) -24.128,-14.957 -24.128,-16.179 cw(c-25.402,-16.179) C43.2 ccw(c-23.562,-17.08) -24.226,-17.744 -22.604,-19.366 cw(c-24.175,-20.937) -21.953,-20.937 U1.6
NetIC2_1: IC2.1 R6.2 R9.2 R11.2 | length 56.7
  Top Layer w0.152: -29.13,10.362 -29.13,16.3
  Top Layer w0.2: -29.13,10.362 -29.13,16.3
  Top Layer w0.203: R11.2 -30.093,19.562 -29.13,18.599 ; -29.892,4.774 -29.493,4.375 ccw(c-27.697,6.171) -27.697,3.631 -23.297,3.631 cw(c-23.297,1.463) -21.764,2.996 cw(c-22.377,2.383) -21.51,2.383 -21.51,2.171 cw(c-23.81,2.171) -21.574,1.631 cw(c-23.81,2.171) -21.833,0.995 cw(c-23.81,2.171) -22.184,0.544 -24.654,-1.926 ccw(c-22.858,-3.722) -25.398,-3.722 R9.2 ; -29.892,5.155 v1(-29.892,8.203) ; IC2.1 -29.656,25.347 -29.13,24.821 -29.13,18.599 ; -29.511,4.52 -29.493,4.502 ; -29.13,16.3 -29.13,18.599
  Bottom Layer w0.4: v1(-29.892,8.203) -21.623,8.203 ccw(c-21.623,9.617) -20.623,8.617 ccw(c-22.653,10.144) -20.113,10.144 R6.2
NetP1_1: P1.1 R10.1 | length 3.2
  Top Layer w0.203: P1.1 ccw(c-11.735,-35.061) -11.301,-35.061 R10.1@-11.301,-32.574 ; R10.1@-11.428,-32.447 R10.1@-11.301,-32.574 ; R10.1 R10.1@-11.301,-32.574
NetR8_1: R8.1 R9.1 U3.3 | length 7.8
  Top Layer w0.203: R9.1 R8.1 -22.05,-5.207 ccw(c-22.05,-4.084) -21.256,-4.878 ccw(c-22.696,-3.438) -20.66,-3.438 U3.3 U3.3@-20.66,-1.459
NetR10_2: R10.2 R13.2 U4.2 U4.6 | length 22.9
  Top Layer w0.203: R13.2 ccw(c-13.612,-30.951) -13.612,-30.985 R10.2 -11.301,-21.053 ccw(c-13.841,-21.053) -11.928,-19.383 ; -11.826,-19.506 cw(c-11.255,-18.935) -11.928,-19.383 ; U4.2@-10.858,-11.132 cw(c-12.804,-11.132) -11.428,-12.508 ccw(c-9.895,-14.041) -12.063,-14.041 U4.6 -12.063,-18.935 ccw(c-11.255,-18.935) -11.928,-19.383
NetR14_3: R14.3 U7.2 | length 6.1
  Bottom Layer w0.4: U7.2 -19.812,-13.384 -18.978,-12.55 -17.376,-12.55 -16.383,-11.557 R14.3
NetRN1_1: RN1.1 U1.31 | length 9.8
  Top Layer w0.203: RN1.1 -25.728,-36.333 -21.953,-32.558 U1.31
NetRN1_2: RN1.2 U1.32 | length 9.7
  Top Layer w0.203: RN1.2 -24.928,-36.041 -21.453,-32.566 U1.32
NetRN1_3: RN1.3 U1.33 | length 9.6
  Top Layer w0.203: RN1.3 -24.128,-35.749 -20.953,-32.574 U1.33
NetRN1_4: RN1.4 U1.34 | length 9.5
  Top Layer w0.203: RN1.4 -23.328,-35.457 -20.453,-32.582 U1.34
NetRN2_2: RN2.2 U1.18 | length 15
  Top Layer w0.203: RN2.2 -28.489,-38.208 -28.489,-36.046 -29.03,-35.505 -29.03,-26.427 -28.024,-25.421 U1.18
NetRN2_3: RN2.3 U1.19 | length 14.5
  Top Layer w0.203: RN2.3 -27.684,-36.384 -28.7,-35.368 -28.7,-26.605 -28.017,-25.922 U1.19
NetRN2_4: RN2.4 U1.30 | length 10.1
  Top Layer w0.203: RN2.4 -26.884,-36.981 -22.453,-32.55 U1.30
NetU1_7: U1.7 U4.3 | length 21.3
  Top Layer w0.203: U1.7 -22.453,-22.311 ccw(c-21.715,-22.311) -22.358,-22.673 -22.345,-22.686 ccw(c-20.549,-20.89) -21.944,-23.012 ccw(c-20.549,-20.89) -20.549,-23.43 -20.064,-23.43 ccw(c-20.064,-22.51) -19.414,-23.161 -18.667,-22.414 cw(c-17.441,-23.64) -17.441,-21.906 -16.798,-21.906 ccw(c-16.798,-19.366) -15.002,-21.162 -14.984,-21.144 ccw(c-16.517,-19.611) -14.349,-19.611 -14.349,-14.883 cw(c-11.375,-14.883) -13.478,-12.78 -12.807,-12.109 ccw(c-14.603,-10.313) -12.063,-10.313 U4.3
NetU1_9: U1.9 U5.3 U6.6 | length 19.8
  Top Layer w0.203: U6.6 -29.208,-14.342 -28.674,-13.807 v3(-28.667,-13.807) ; v3(-24.511,-13.686) -24.511,-12.829 -24.705,-12.635 -24.873,-12.635 ; U1.9 -23.454,-20.254 ccw(c-24.889,-20.254) -23.873,-19.24 -24.954,-18.159 cw(c-24.137,-17.343) -25.292,-17.343 -25.292,-13.646 cw(c-23.862,-13.646) -24.873,-12.636 ; -24.873,-12.635 -23.952,-11.714 ; -23.952,-11.714 ccw(c-24.184,-11.48) -23.95,-11.712 ; -23.952,-11.714 -23.95,-11.712 ; -23.95,-11.712 ccw(c-24.184,-11.48) -23.924,-11.682 cw(c-23.764,-11.808) -23.917,-11.675 ccw(c-25.198,-10.549) U5.3@-23.524,-10.871 ; U5.3@-23.524,-10.871 ccw(c-25.198,-10.549) -23.493,-10.549 U5.3 -23.524,-10.349 U5.3@-23.524,-10.871
  Bottom Layer w0.203: v3(-28.667,-13.807) -28.606,-13.747 -24.572,-13.747 v3(-24.511,-13.686)
NetU1_10: U1.10 U2.3 U3.2 U3.6 | length 27.3
  Top Layer w0.203: -24.464,-11.76 -25.155,-12.45 ccw(c-23.954,-13.651) -25.652,-13.651 -25.652,-17.251 ccw(c-23.918,-17.251) -25.144,-18.477 -24.369,-19.252 cw(c-25.373,-20.255) -23.954,-20.255 U1.10 ; -24.464,-11.759 ccw(c-25.276,-10.948) -24.128,-10.948 -24.128,-9.587 cw(c-23.241,-9.587) -23.868,-8.959 cw(c-22.775,-10.305) -22.775,-8.571 -20.064,-8.571 -18.825,-8.571 cw(c-18.825,-9.872) -17.905,-8.952 cw(c-18.212,-9.259) -17.778,-9.259 U2.3 ; U3.6@-20.699,-7.06 -20.699,-5.86 cw(c-18.531,-5.86) -20.064,-4.327 ccw(c-21.597,-2.794) U3.2@-19.429,-2.794 ; -20.66,-8.476 U3.6
NetU1_11: U1.11 U6.2 | length 12.3
  Top Layer w0.203: U6.2 -27.938,-10.609 ccw(c-26.42,-10.609) -27.865,-11.074 ccw(c-26.42,-10.609) -27.494,-11.682 ; -27.494,-11.682 -26.541,-12.635 cw(c-27.767,-13.861) -26.033,-13.861 -26.033,-17.232 ccw(c-24.047,-17.232) -25.452,-18.636 ; -25.451,-18.637 -24.869,-19.218 cw(c-25.872,-20.221) -24.454,-20.221 U1.11
OUT: P2.16 R13.1 | length 13.5
  Top Layer w0.203: P2.16 -16.195,-35.986 cw(c-13.655,-35.986) -15.451,-34.19 R13.1
SPI1_MISO: P2.22 RN1.8 | length 5.4
  Top Layer w0.4: P2.22 -23.796,-44.947 -23.796,-43.232 -23.328,-42.764 RN1.8
SPI1_MOSI: P2.26 RN1.6 | length 7.1
  Top Layer w0.4: P2.26 -28.685,-44.756 -28.114,-44.756 -24.928,-41.57 RN1.6
SPI1_NSS: P2.24 RN1.7 | length 6.1
  Top Layer w0.4: P2.24 -26.355,-44.668 -26.023,-44.336 -26.023,-44.189 -24.128,-42.294 RN1.7
SPI1_SCK: P2.28 RN1.5 | length 8.6
  Top Layer w0.4: P2.28 -29.955,-43.486 -28.114,-43.486 -25.728,-41.1 RN1.5
V_ref_pull: R6.1 R7.1 R14.1 U7.6 | length 37.2
  Top Layer w0.4: R7.1 v1(-20.113,15.188)
  Int2 (PWR) w0.4: v1(-20.113,15.188) -20.113,-4.525 v1(-19.685,-4.953)
  Bottom Layer w0.4: R6.1 v1(-20.113,15.188) ; v1(-19.685,-4.953) -21.082,-6.35 U7.6 -21.082,-10.549 -20.709,-10.922 -17.526,-10.922 -17.211,-10.607 R14.1
Vz: IC1.1 R7.2 R8.2 R12.2 R15.2 U7.3 | length 54.5
  Top Layer w0.2: -11.586,10.362 -11.586,16.3
  Top Layer w0.203: R8.2 -23.747,-2.96 cw(c-21.207,-2.96) -23.003,-1.164 ; v1(-22.225,-4.064) -23.003,-3.286 -23.003,-1.164 ; -17.192,5.663 cw(c-19.645,5.663) -17.91,3.929 -23.003,-1.164 ; R12.2 -12.567,19.689 -11.586,18.708 ; IC1.1 -12.112,25.347 -11.586,24.821 -11.586,18.708 ; -11.985,8.965 -11.586,9.364 -11.586,10.362 ; -11.586,16.3 -11.586,18.708
  Top Layer w0.4: R7.2 -20.113,12.617 ccw(c-18.348,12.617) -19.596,11.369 -19.079,10.852 ccw(c-17.283,12.648) -17.283,10.108 -16.811,10.108
  Bottom Layer w0.4: R15.2 -23.43,-16.826 -22.84,-16.236 -22.84,-16.231 -21.331,-14.722 -21.174,-14.722 -21.082,-14.63 -21.082,-12.446 -23.368,-10.16 -23.368,-8.128 -22.352,-7.112 -22.352,-4.445 v1@-22.225,-4.318
pads on no net: P3.1 P3.2 P3.3 P3.4 P3.5 P3.6 P3.7 P3.8 P3.9 P3.10 P3.11 P3.12 P3.13 P3.14 P3.15 P3.16 P3.17 P3.18 P3.19 P3.20 P3.21 P3.22 P3.23 P3.24 P3.25 P3.26 P3.27 P3.28 P3.29 P3.30 P3.31 P3.32 P3.33 P3.34 P3.35 P3.36 RN2.1 RN2.5 U1.1 U1.12 U1.13 U1.15 U1.24 U1.25 U1.29 U1.36 U1.37 U1.48 U2.1 U2.5 U2.8 U3.1 U3.5 U3.8 U4.1 U4.5 U4.8 U5.1 U5.5 U5.8 U6.1 U6.5 U6.8 U7.1 U7.5 U7.8

## Polygon pours and split planes (outlines as drawn)
+15V on Top Layer "+15V_L01_P014" (solid, pour order 14): -10.951,28.269 -8.937,28.269 -8.937,21.157 -10.951,21.157 -10.951,27.126
+15V on Top Layer "+15V_L01_P012" (solid, pour order 12): -28.495,28.142 -26.59,28.142 -26.59,21.157 -28.495,21.157 -28.495,27.126
AGND on Top Layer "AGND_L01_P037" (solid, pour order 37): -6.983,-20.89 -6.983,-2.638 ccw(c-9.523,-2.638) -7.727,-0.842 -10.041,1.472 -29.833,1.472 -32.786,-1.481 ccw(c-31.919,-2.348) -33.145,-2.348 -33.145,-20.89
-15V on Top Layer "-15V_L01_P015" (solid, pour order 15): -11.459,28.269 -13.509,28.269 -13.509,21.157 -11.459,21.157
-15V on Top Layer "-15V_L01_P013" (solid, pour order 13): -29.003,28.142 -30.908,28.142 -30.908,21.157 -29.003,21.157
Vz on Top Layer "VZ_L01_P004" (solid, pour order 4): -17.428,10.616 -17.428,4.266 -11.332,4.266 -11.332,10.616
NetIC2_1 on Top Layer "NETIC2_1_L01_P003" (solid, pour order 3): -35.099,10.616 -35.099,4.266 -29.003,4.266 -29.003,10.616
AGND on Top Layer "AGND_L01_P002" (solid, pour order 2): -11.078,10.616 -11.078,4.266 -4.982,4.266 -4.982,10.616
AGND on Top Layer "AGND_L01_P000" (solid, pour order 0): -28.749,10.616 -28.749,4.266 -22.653,4.266 -22.653,10.616
AGND on Int1 (GND) "AGND_L02_P048" (solid, pour order 48): -21.51,4.436 -21.51,-0.814 -18.462,-0.814 -18.462,4.478
-15V on Int1 (GND) "-15V_L02_P050" (solid, pour order 50): -29.003,28.142 -30.908,28.142 -30.908,21.157 -29.003,21.157
+15V on Int1 (GND) "+15V_L02_P049" (solid, pour order 49): -28.495,28.142 -26.59,28.142 -26.59,21.157 -28.495,21.157 -28.495,27.126
+15V on Int1 (GND) "+15V_L02_P051" (solid, pour order 51): -10.951,28.269 -8.937,28.269 -8.937,21.157 -10.951,21.157 -10.951,27.126
-15V on Int1 (GND) "-15V_L02_P052" (solid, pour order 52): -11.459,28.269 -13.509,28.269 -13.509,21.157 -11.459,21.157
AGND on Int1 (GND) "AGND_L02_P040" (solid, pour order 40): -6.983,-24.192 -6.983,-2.465 ccw(c-9.523,-2.465) -7.727,-0.669 -7.802,-0.594 ccw(c-7.86,-0.653) -7.86,-0.57 -31.877,-0.57 ccw(c-31.875,-1.49) -32.525,-0.839 -32.637,-0.951 ccw(c-31.411,-2.177) -33.145,-2.177 -33.145,-24.192
DGND on Int1 (GND) "DGND_L02_P046" (solid, pour order 46): -20.367,-38.152 -20.367,-43.994 -19.986,-44.375 -19.986,-48.693 -20.113,-48.82 -20.24,-48.693 -42.846,-48.693 -42.846,-43.74 -42.973,-43.613 -37.625,-43.613 -32.809,-38.797 -32.813,-38.793 -32.813,-37.136
AGND on Int1 (GND) "AGND_L02_P045" (solid, pour order 45): -20.064,-38.279 -20.064,-43.065 ccw(c-18.93,-43.065) -19.732,-43.867 cw(c-20.039,-44.174) -19.605,-44.174 -19.605,-48.207 ccw(c-18.738,-48.207) -19.351,-48.82 cw(c-19.044,-49.127) -19.044,-48.693 2.874,-48.693 2.874,-43.74 -1.359,-43.74 cw(c-1.359,-41.2) -3.155,-42.996 -7.872,-38.279
AGND on Int1 (GND) "AGND_L02_P041" (solid, pour order 41): -22.858,-24.065 -22.858,-26.605 -20.064,-26.605 -20.064,-38.787 -7.364,-38.787 -7.364,-23.938
DGND on Int1 (GND) "DGND_L02_P043" (solid, pour order 43): -22.985,-24.446 -22.985,-26.732 -20.191,-26.732 -20.191,-38.797 -33.145,-38.797 -33.145,-24.446
AGND on Int1 (GND) "AGND_L02_P032" (solid, pour order 32): -42.211,34.619 -42.211,37.921 cw(c-39.671,37.921) -39.671,40.461 -0.301,40.461 cw(c-0.301,37.921) 2.239,37.921 2.239,6.679 cw(c-0.301,6.679) -0.301,4.139 -39.798,4.139 cw(c-39.798,6.679) -42.338,6.679 -42.338,12.013
+15V on Int2 (PWR) "+15V_L03_P059" (solid, pour order 59): -10.951,28.269 -8.937,28.269 -8.937,21.157 -10.951,21.157 -10.951,27.126
-15V on Int2 (PWR) "-15V_L03_P060" (solid, pour order 60): -11.459,28.269 -13.509,28.269 -13.509,21.157 -11.459,21.157
+15V on Int2 (PWR) "+15V_L03_P057" (solid, pour order 57): -28.495,28.142 -26.59,28.142 -26.59,21.157 -28.495,21.157 -28.495,27.126
-15V on Int2 (PWR) "-15V_L03_P058" (solid, pour order 58): -29.003,28.142 -30.908,28.142 -30.908,21.157 -29.003,21.157
+15V on Int2 (PWR) "+15V_L03_P047" (solid, pour order 47): -21.383,4.44 -21.383,-0.814 -18.462,-0.814 -18.462,4.48
+15V on Int2 (PWR) "+15V_L03_P031" (solid, pour order 31): -42.211,34.619 -42.211,37.921 cw(c-39.671,37.921) -39.671,40.461 -0.301,40.461 cw(c-0.301,37.921) 2.239,37.921 2.239,6.679 cw(c-0.301,6.679) -0.301,4.139 -39.798,4.139 cw(c-39.798,6.679) -42.338,6.679 -42.338,12.013
+15V on Int2 (PWR) "+15V_L03_P033" (solid, pour order 33): -6.983,-24.192 -6.983,-2.465 ccw(c-9.523,-2.465) -7.727,-0.669 -7.802,-0.594 ccw(c-7.86,-0.653) -7.86,-0.57 -31.877,-0.57 ccw(c-31.875,-1.49) -32.525,-0.839 -32.637,-0.951 ccw(c-31.411,-2.177) -33.145,-2.177 -33.145,-24.192
AGND on Bottom Layer "AGND_L04_P063" (solid, pour order 63): -35.306,-31.877 -43.815,-31.877 cw(c-43.815,-31.75) -43.942,-31.75 -43.942,0.762 cw(c-41.402,0.762) -41.402,3.302 -28.245,3.251 -28.245,1.524 -32.766,1.524 ccw(c-32.766,-1.016) -35.306,-1.016 -35.306,-31.75
AGND on Bottom Layer "AGND_L04_P062" (solid, pour order 62): 3.937,-31.496 3.937,1.397 ccw(c1.397,1.397) 3.077,3.302 -13.716,3.302 -13.716,1.524 -7.493,1.524 cw(c-7.493,-1.016) -4.953,-1.016 -4.953,-31.496
AGND on Bottom Layer "AGND_L04_P061" (solid, pour order 61): -42.211,34.619 -42.211,37.921 cw(c-39.671,37.921) -39.671,40.461 -0.301,40.461 cw(c-0.301,37.921) 2.239,37.921 2.239,6.679 cw(c-0.301,6.679) -0.301,4.139 -39.798,4.139 cw(c-39.798,6.679) -42.338,6.679 -42.338,12.013
AGND on Bottom Layer "-AGND_L04_P034" (solid, pour order 34): -6.983,-24.192 -6.983,-2.465 ccw(c-9.523,-2.465) -7.727,-0.669 -7.802,-0.594 ccw(c-7.86,-0.653) -7.86,-0.57 -31.875,-0.57 ccw(c-31.875,-1.49) -32.525,-0.839 -32.637,-0.951 ccw(c-31.411,-2.177) -33.145,-2.177 -33.145,-24.192
AGND on Bottom Layer "AGND_L04_P042" (solid, pour order 42): -22.858,-24.065 -22.858,-26.605 -20.064,-26.605 -20.064,-38.797 -7.364,-38.797 -7.364,-23.938
DGND on Bottom Layer "DGND_L04_P044" (solid, pour order 44): -23.112,-24.446 -23.112,-26.732 -20.318,-26.732 -20.318,-38.797 -33.145,-38.797 -33.145,-24.446
+15V on Bottom Layer "+15V_L04_P026" (solid, pour order 26): -10.951,28.269 -8.937,28.269 -8.937,21.03 -10.951,21.03 -10.951,26.999
-15V on Bottom Layer "-15V_L04_P027" (solid, pour order 27): -11.459,28.269 -13.47,28.269 -13.47,21.157 -11.459,21.157
+15V on Bottom Layer "+15V_L04_P024" (solid, pour order 24): -28.495,28.396 -26.59,28.396 -26.59,21.157 -28.495,21.157 -28.495,27.126
-15V on Bottom Layer "-15V_L04_P025" (solid, pour order 25): -29.003,28.396 -30.908,28.396 -30.908,21.157 -29.003,21.157
no net on Bottom Solder "NONET_L04_P064" (solid, pour order 64): -35.306,-31.877 -43.815,-31.877 cw(c-43.815,-31.75) -43.942,-31.75 -43.942,0.762 cw(c-41.402,0.762) -41.402,3.302 -28.131,3.238 ccw(c-25.96,2.449) -28.053,1.472 -32.766,1.524 ccw(c-32.766,-1.016) -35.306,-1.016 -35.306,-31.75
no net on Bottom Solder "NONET_L-01_P-001" (solid): 3.937,-31.496 3.937,1.397 ccw(c1.397,1.397) 3.077,3.302 -13.716,3.302 -13.716,1.524 -7.493,1.524 cw(c-7.493,-1.016) -4.953,-1.016 -4.953,-31.496
no net on Bottom Solder "NONET_L-01_P-001" (solid): -4.335,11.654 -4.305,11.684 2.159,11.684 2.159,37.846 ccw(c-0.381,37.846) -0.381,40.386 -39.751,40.386 ccw(c-39.751,37.846) -42.291,37.846 -42.291,11.684 -36.195,11.684 -36.195,32.639 cw(c-35.052,32.639) -35.052,33.782 -6.731,33.782 cw(c-6.731,31.242) -4.191,31.242 -4.191,12.827

## Keep-outs
Keep-Out Layer:
  circle w0.15: c-0.005,-35.052 r2.1
  circle w0.15: c-40.005,-35.052 r2.11
  circle w0.15: c-0.005,-0.052 r2.1
  circle w0.15: c-40.005,-0.052 r2.11
  circle w0.15: c-38.909,7.822 r2.1
  circle w0.15: c-1.317,7.822 r2.11
  circle w0.15: c-1.317,37.032 r2.11
  circle w0.15: c-38.909,37.032 r2.1
  lines w0.254: -45.005,-49.506 4.995,-49.506 4.995,50.494 -44.624,50.494 -45.005,50.494 -45.005,49.224 -45.005,-28.5 -45.005,-49.506 ; -35.988,12.14 ccw(c-34.718,12.14) -34.718,10.87 -31.797,10.87 ccw(c-31.797,12.14) -30.527,12.14 -30.527,15.696 ccw(c-31.797,15.696) -31.797,16.966 -33.575,16.966 cw(c-33.575,18.236) -34.845,18.236 -34.845,25.094 -34.845,28.523 cw(c-33.575,28.523) -33.575,29.793 -24.177,29.793 cw(c-24.177,28.523) -22.907,28.523 -22.907,25.602 -22.907,18.236 cw(c-24.177,18.236) -24.177,16.966 -25.955,16.966 ccw(c-25.955,15.696) -27.225,15.696 -27.225,12.14 ccw(c-25.955,12.14) -25.955,10.87 -23.034,10.87 ccw(c-23.034,12.14) -21.764,12.14 -21.764,24.967 -21.764,32.206 ccw(c-23.034,32.206) -23.034,33.476 -34.718,33.476 ccw(c-34.718,32.206) -35.988,32.206 -35.988,12.14 ; -35.304,-38.67 -34.288,-38.67 -33.272,-38.67 -33.272,-1.83 cw(c-32.002,-1.83) -32.002,-0.56 -31.67,-0.56 ccw(c-31.66,-0.56) -31.66,-0.57 -26.346,-0.57 ccw(c-26.346,-0.56) -26.336,-0.56 -26.336,0.446 -26.336,1.462 -32.637,1.462 -34.034,1.462 ccw(c-34.034,0.192) -35.304,0.192 -35.304,-1.967 -35.304,-38.67 ; -18.462,12.14 ccw(c-17.192,12.14) -17.192,10.87 -14.271,10.87 ccw(c-14.271,12.14) -13.001,12.14 -13.001,15.696 ccw(c-14.271,15.696) -14.271,16.966 -16.049,16.966 cw(c-16.049,18.236) -17.319,18.236 -17.319,27.126 -17.319,28.523 cw(c-16.049,28.523) -16.049,29.793 -6.651,29.793 cw(c-6.651,28.523) -5.381,28.523 -5.381,18.236 cw(c-6.651,18.236) -6.651,16.966 -8.429,16.966 ccw(c-8.429,15.696) -9.699,15.696 -9.699,12.14 ccw(c-8.429,12.14) -8.429,10.87 -5.508,10.87 ccw(c-5.508,12.14) -4.238,12.14 -4.238,26.237 -4.238,32.206 ccw(c-5.508,32.206) -5.508,33.476 -17.192,33.476 ccw(c-17.192,32.206) -18.462,32.206 -18.462,12.14 ; -14.398,-0.56 -8.253,-0.56 cw(c-8.253,-1.83) -6.983,-1.83 -6.983,-38.582 ccw(c-6.954,-38.582) -6.954,-38.611 -4.951,-38.611 -4.951,-1.068 -4.951,0.192 ccw(c-6.221,0.192) -6.221,1.462 -9.328,1.462 -14.398,1.462 -14.398,0.456 -14.398,-0.56

## Other copper
Int1 (GND):
  pour cut-out: -15.287,16.839 -9.191,16.839 cw(c-9.191,14.299) -6.651,14.299 -6.651,10.743 cw(c-6.905,10.743) -6.905,10.489 -15.922,10.489
  pour cut-out: -34.464,10.489 -24.431,10.489 ccw(c-24.431,10.805) -24.115,10.805 -24.115,16.966
Int2 (PWR):